# Altium PCB RGB_Plugin_Board.PcbDoc (part 3 of 3)
Units mil, origin at the board's own origin, x right, y up, seen from the top; angles counter-clockwise.
Board outline 2420 x 984.41 mil, 2 copper layers (TOP, BOTTOM), stack 81.54 mil thick; 20 components, 19 nets, 2525 pads, 9 vias.
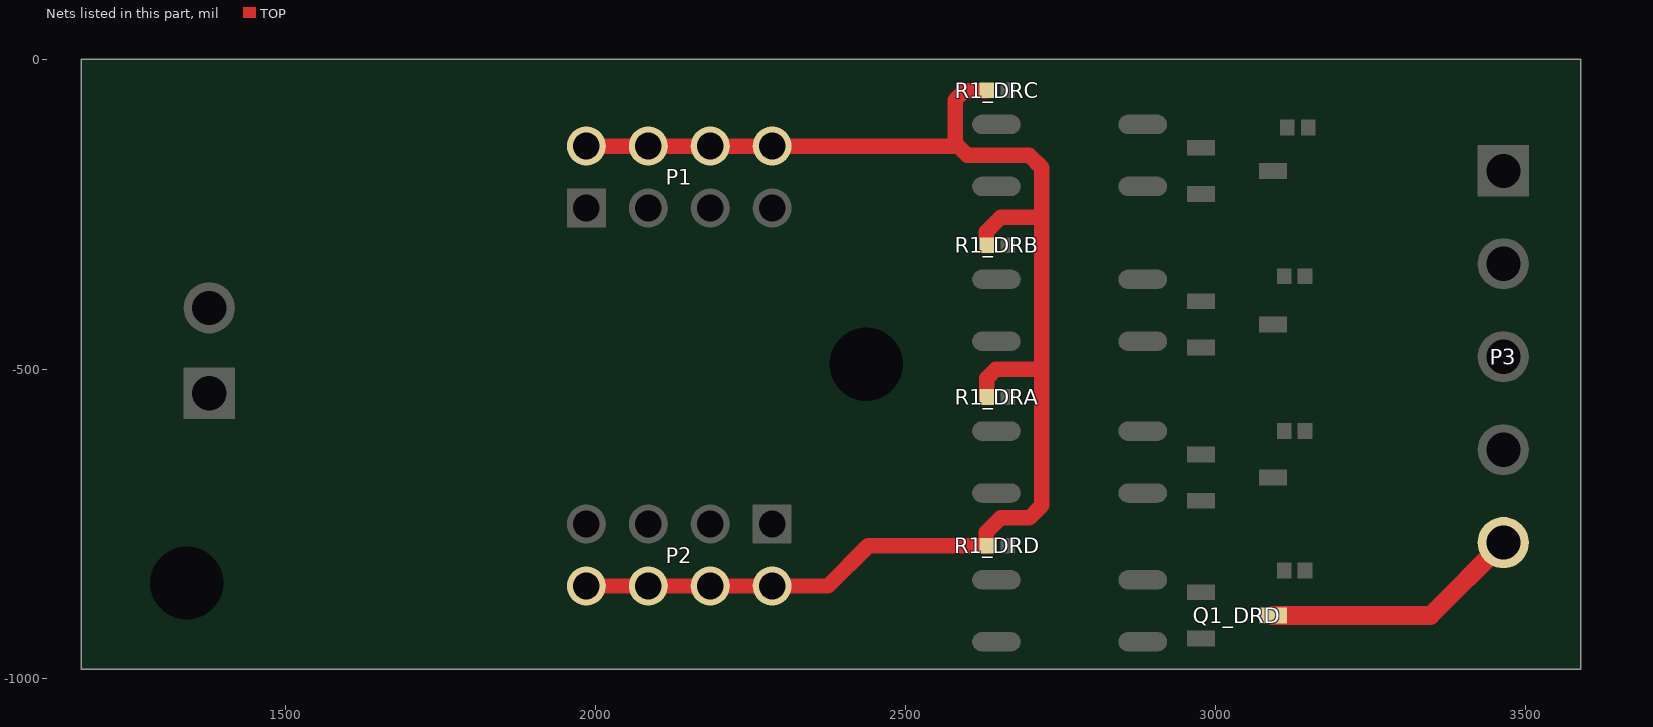
[diagram p3: the nets of this part, all layers, seen from the top]

## Via types
v1: diameter 23.62, hole 11.81, TOP to BOTTOM, 9 vias

## Nets (pads, with @x,y where several pads share a name; then routed paths per layer and width w, separated by ;. In a path a pad name is that pad's centre, name@x,y a point inside that pad or via, vN(x,y) a via of type N, cw(c..) or ccw(c..) an arc to the next point about the centre after c; other vN are vias at no path point) (continued)
RELAY_VCC: P1.2 P1.4 P1.6 P1.8 P2.2 P2.4 P2.6 P2.8 R1_DRA.1 R1_DRB.1 R1_DRC.1 R1_DRD.1 | length 2460.3
  TOP w25: P2.8@1985,-850 P2.6@2085,-850 P2.4@2185,-850 P2.2@2285,-850 2375,-850 2440,-785 R1_DRD.1@2630.69,-785 ; P1.2@1985,-140 P1.4@2085,-140 P1.6@2185,-140 P1.8@2285,-140 2585,-140 2600,-155 2700,-155 2720,-175 2720,-255 ; 2575,-140 2580.3,-134.7 2580.3,-65.64 2594.94,-50.99 R1_DRC.1@2630.69,-50.99 ; 2630.69,-284.31 2630.69,-277.88 2653.57,-255 2720,-255 ; R1_DRD.1@2631.54,-785 R1_DRD.1@2630.69,-785 ; R1_DRA.1@2631.54,-545 2631.54,-514.64 2646.18,-500 2720,-500 ; R1_DRD.1@2630.69,-785 2630.69,-762.88 2653.57,-740 2700,-740 2720,-720 2720,-500 ; 2720,-500 2720,-255
WHITE: P3.5 Q1_DRD.3 | length 420.6
  TOP w30: Q1_DRD.3@3093.07,-897.6 3347.4,-897.6 P3.5@3465,-780

## Polygon pours and split planes (outlines as drawn)
GND on BOTTOM "GND_L02_P001" (solid, pour order 1): 0,-984.41 0,0 4724.41,0 4724.41,-984.41
GND on TOP "GND_L01_P006" (solid, pour order 6): 0,-984.41 0,0 4724.41,0 4724.41,-984.41

## Silkscreen, mask and mechanical layers (free items; w line width, h text height)
Top Overlay:
  drawing of 1270 lines, arcs and shapes, not listed
  text "Expatria" at 1284.04,-130.57 h60
  text "12V" at 3225,-195 h35
  text "Technologies" at 1410,-225 h40
  text "GND" at 1285,-295 h35
  text "RED" at 3215,-350 h35
  text "AUX3" at 1970,-375 h35 r270
  text "AUX2" at 2056.67,-375 h35 r270
  text "AUX1" at 2143.33,-375 h35 r270
  text "AUX0" at 2230,-375 h35 r270
  text "GRN" at 3220,-500 h35
  text "BLU" at 3210,-670 h35
  text "LED V+" at 1260,-705 h35
  text "WHT" at 3215,-820 h35
Bottom Overlay:
  drawing of 679 lines, arcs and shapes, not listed
  text "REV '.VarRevNo'" at 1370,-60 h60
  text "Licensed under CERN-OHL-P v2" at 1895,-699.47 h50
Bottom Solder:
  region: 2691.23,-936.9 2690.03,-960.51 2694.87,-960.51 2693.66,-937.34 cw(c2696.36,-937.35) 2695.89,-934.69 cw(c2696.12,-940.72) 2696.64,-934.71 2719.7,-938.76 2716.59,-930.17 cw(c2719.78,-929.29) 2716.48,-929.56 cw(c2718.23,-929.56) 2717.13,-928.21 2742.39,-907.75 2736.7,-905.09 cw(c2737.45,-903.51) 2735.7,-903.51 cw(c2737.45,-903.51) 2735.79,-902.97 2740.78,-887.61 2726.23,-890.7 cw(c2726.02,-888.7) 2724.27,-889.68 2721.45,-883.05 2710.09,-895.24 cw(c2708.82,-894.04) 2708.82,-895.78 cw(c2708.87,-893.98) 2707.09,-894.25 cw(c2720.71,-894.43) 2707.11,-893.71 2712.59,-865.46 2703.81,-870.53 cw(c2702.92,-869.03) 2702.93,-870.77 cw(c2702.93,-869.03) 2701.36,-869.81 2692.45,-852.3 2683.54,-869.81 cw(c2681.98,-869.03) 2681.98,-870.77 cw(c2681.98,-869.03) 2681.09,-870.53 2672.31,-865.46 2677.79,-893.71 cw(c2675.81,-893.84) 2676.29,-895.77 cw(c2676.17,-893.78) 2674.81,-895.24 2663.45,-883.05 2660.63,-889.68 cw(c2659.03,-888.99) 2659.03,-890.73 2644.12,-887.61 2649.11,-902.97 cw(c2647.46,-903.51) 2649.2,-903.51 cw(c2647.46,-903.51) 2648.2,-905.09 2642.51,-907.75 2667.78,-928.21 cw(c2666.68,-929.56) 2668.42,-929.56 cw(c2666.68,-929.56) 2668.31,-930.17 2665.2,-938.76 2688.26,-934.7 cw(c2689.2,-945.72) 2688.82,-934.67 cw(c2688.69,-937.22)
  text "Designed in Canada" at 3551.97,-950.34 h100
Mechanical 3:
  the board outline again, w10
Mechanical 6:
  the board outline again, w10
Mechanical 9:
  region: 7245.42,-7032.32
  region: 7245.42,-7032.32
  region: 7245.42,-7032.32
  region: 7245.42,-7032.32
  region: 7245.42,-7032.32
  region: 7245.42,-7032.32
  region: 7245.42,-7032.32
  region: 7245.42,-7032.32
  region: 7245.42,-7032.32
  region: 7245.42,-7032.32
  region: 7245.42,-7032.32
  region: 7245.42,-7032.32
  region: 7245.42,-7032.32
  region: 7245.42,-7032.32
  region: 7245.42,-7032.32
  region: 7245.42,-7032.32
  region: 7245.42,-7032.32
  region: 7245.42,-7032.32
  region: 7245.42,-7032.32
  region: 7245.42,-7032.32
  lines w6: -2751.86,-4979.27 -2551.86,-4979.27 ; -2751.86,520.73 -2551.86,520.73 ; -2737.1,-998.96 -2537.1,-998.96 ; 83.14,-7729.27 83.14,-7529.27 ; 83.14,3070.73 83.14,3270.73 ; 2913.14,-7729.27 2913.14,-7529.27 ; 2913.14,3070.73 2913.14,3270.73 ; 3248.14,-7529.27 3248.14,-6329.27 9566.57,-6329.27 ; 5748.14,-7729.27 5748.14,-7529.27 ; 5748.14,3070.73 5748.14,3270.73 ; 7248.14,-7529.27 7248.14,-6329.27 ; 7648.14,-7529.27 9048.14,-7529.27 ; 8578.14,-7729.27 8578.14,-7529.27 ; 8578.14,3070.73 8578.14,3270.73 ; 9548.14,-7229.27 14048.14,-7229.27 ; 9548.14,-6929.27 14048.14,-6929.27 ; 9548.14,-6629.27 11048.14,-6629.27 ; 9548.14,-6344.2 9548.14,-7529.27 14048.14,-7529.27 ; 9548.14,-6329.27 11048.14,-6329.27 ; 11048.14,-7529.27 11048.14,-6929.27 11048.14,-6329.27 ; 11413.14,-7729.27 11413.14,-7529.27 ; 11413.14,3070.73 11413.14,3270.73 ; 13148.14,-7529.27 13148.14,-6929.27 ; 14048.14,-4979.27 14248.14,-4979.27 ; 14048.14,-2242.27 14248.14,-2242.27 ; 14048.14,520.73 14248.14,520.73 ; 11048.14,-6329.27 14048.14,-6329.27 14048.14,-7529.27 ; 14048.14,-7529.27 14048.14,3070.73 -2551.86,3070.73 -2551.86,-7529.27 14048.14,-7529.27 ; -2751.86,-7729.27 14248.14,-7729.27 14248.14,3270.73 -2751.86,3270.73 -2751.86,-7729.27
  text "1" at -1350.53,3135.73 h120
  text "2" at 1475.14,3135.73 h120
  text "3" at 4300.14,3135.73 h120
  text "4" at 7141.15,3135.73 h120
  text "5" at 9975.14,3135.73 h120
  text "6" at 12810.14,3135.73 h120
  text "A" at -2676.86,1892.73 h120
  text "A" at 14130.57,1834.8 h120
  text "B" at 14134.7,-869.7 h120
  text "C" at -2676.86,-3622.27 h120
  text "ENGINEER:" at 9598.14,-6429.27 h120
  text "TITLE:" at 11098.14,-6429.27 h120
  text "D" at -2676.86,-6444.27 h120
  text "D" at 14123.14,-6444.27 h120
  text "Dustin McIntire" at 9667.14,-6561.27 h120
  text "PCB DESIGNER:" at 9598.14,-6724.27 h120
  text "STV Bypass" at 11290.57,-6733.2 h200
  text "This document contains confidential information protected under Patented and" at 3386.38,-6817.77 h120
  text "Andrew Marles" at 9655.57,-6844.69 h120
  text "or Copyrighted Material as defined by US Regulations.  No disclosure," at 3386.38,-6917.77 h120
  text "reproduction, transfer of this material in part or in its entirety shall be done" at 3386.38,-7017.77 h120
  text "DATE:" at 9598.14,-7029.27 h120
  text "PART NO.:" at 11098.14,-7029.27 h120
  text "REV:" at 13198.14,-7029.27 h120
  text "without prior written  approval by Cambridge Mobile Telematics." at 3386.38,-7117.77 h120
  text "'.VarRevNo'" at 13402.14,-7147.27 h120
  text ".PRINT_DATE" at 9648.14,-7149.27 h120
  text "bluebell-mfg" at 11477.14,-7149.27 h120
  text "FILE NAME:" at 9598.14,-7329.27 h120
  text "DWG NO:" at 11098.14,-7329.27 h120
  text "SCALE:" at 13198.14,-7329.27 h120
  text ".Print_Scale" at 13289.14,-7441.27 h120
  text ".PCB_FILE_NAME_NO_PATH" at 9648.14,-7449.27 h120
  text "2" at 1475.14,-7664.27 h120
  text "3" at 4300.14,-7664.27 h120
  text "4" at 7141.15,-7664.27 h120
  text "5" at 9975.14,-7664.27 h120
  text "6" at 12810.14,-7664.27 h120
Drill Drawing:
  drawing of 166 lines, arcs and shapes, not listed
  text "NOTES: UNLESS OTHERWISE SPECIFIED, ALL DIMENSIONS ARE IN INCHES." at 8916.57,1655.8 h100
  text "1. MATERIAL: EPOXY GLASS FR-4 UL94V-0 HIGHEST IN STOCK AVAILABLE Tg." at 8916.57,1405.8 h100
  text "FABRICATE PCB IN ACCORDANCE WITH IPC-6012, CLASS2; PER IPC-6011." at 9066.57,1305.8 h100
  text "2. HOLE LOCATION TOLERANCE +/- .003 DIAMETER OF TRUE POSITION." at 8916.57,1105.8 h100
  text "ARTWORK REGISTRATION FRONT TO BACK +/- .003" at 9066.57,1005.8 h100
  text "3. ALL PLATED THROUGH HOLES TO HAVE A MINIMUM PLATING OF .0007 COPPER." at 8916.57,855.8 h100
  text "ANNULAR RING TO BE .002 MIN.  VIA HOLES MAY HAVE A .001 ANNULAR RING." at 9066.57,755.8 h100
  text "TEARDROPS MAY BE ADDED TO AVOID DRILL BREAKOUT." at 9066.57,655.8 h100
  text "ALL VIAS FILLED AND PLATED." at 9066.57,561.32 h100
  text "4. LPI (LIQUID PHOTO IMAGABLE) SOLDERMASK PER IPC-SM-840, TYPE B, CLASS H" at 8925.16,394.15 h100
  text "BOTH SIDES, COLOR: TRANSPARENT GREEN WITH MAXIMUM MISREGISTRATION" at 9075.16,294.15 h100
  text "TO BE .003 OVER BARE COPPER.  ALL EXPOSED COPPER AREAS, BOTH SIDES" at 9075.16,194.15 h100
  text "TO BE PLATED 2-6 MICROINCHES ELECTROLESS GOLD OVER 120 MICROINCHES" at 9075.16,94.15 h100
  text "ELECTROLESS NICKEL.  MANUFACTURER MAY MODIFY SOLDERMASK TO REMOVE" at 9075.16,-5.85 h100
  text "ANY SLIVERS THAT ARE .004 OR LESS BETWEEN FINE PITCHED LANDS." at 9075.16,-105.85 h100
  text "5. SILKSCREEN BOTH SIDES USING WHITE EPOXY INK.  MANUFACTURER MUST MODIFY" at 8935.16,-275.85 h100
  text "SLIKSCREEN IMAGE TO REMOVE ANY WHITE EPOXY INK FROM EXPOSED METAL." at 9085.16,-375.85 h100
  text "6. IF REQUIRED, MAXIMUM RADIUS ON ALL INSIDE CORNERS TO BE .025" at 8919.71,-523.65 h100
  text "7. MANUFACTURER TO MARK BOARD WITH COPPER OR WHITE EPOXY INK, IN AN" at 8935.16,-675.85 h100
  text "OPEN AREA ON BOTTOM SIDE, DESIGNATED WITH A UL IDENTIFICATION CODE AS" at 9085.16,-775.85 h100
  text "REQUIRED BY UL796 AND UL794" at 9085.16,-875.85 h100
  text "8. MANUFACTURER TO MARK BOARD WITH COPPER OR WHITE EPOXY INK, IN AN" at 8919.71,-1023.65 h100
  text "OPEN AREA ON BOTTOM SIDE, DESIGNATED WITH A DATE CODE INDICATING" at 9085.16,-1125.85 h100
  text "YEAR AND WEEK OF FABRICATION, 4 DIGIT FORMAT" at 9069.71,-1223.65 h100
  text "9. FINISHED BOARD TO COMPLY WITH PHYSICAL AND ENVIRONMENTAL REQUIREMENTS" at 8919.71,-1373.65 h100
  text "OF IPC-A-600. BOW AND TWIST PER 10-3, CLASS 2, MULTI AND UL796" at 9069.71,-1473.65 h100
  text "10. REFERENCE ONLY: APPROXIMATE MINIMUM LINE IS .004 AND SPACE IS .004" at 8881.16,-1636.85 h100
  text "11. UNLESS OTHERWISE SPECIFIED, BOARD SHALL BE .083 NOMINAL THICKNESS" at 8881.16,-1786.85 h100
  text "Layer" at 8515.34,-2605 h60
  text "Name" at 8766.44,-2605 h60
  text "Material" at 9252.03,-2605 h60
  text "Thickness" at 9688.46,-2605 h60
  text "Constant" at 10046.84,-2605 h60
  text "Board Layer Stack" at 10378.64,-2605 h60
  text "Top Overlay" at 8766.44,-2725 h60
  text "Top Solder" at 8766.44,-2845 h60
  text "Solder Resist" at 9252.03,-2845 h60
  text "0.40mil" at 9688.46,-2845 h60
  text "3.5" at 10046.84,-2845 h60
  text "1" at 8515.34,-2965 h60
  text "TOP" at 8766.44,-2965 h60
  text "1.40mil" at 9688.46,-2965 h60
  text "Dielectric 1" at 8766.44,-3085 h60
  text "FR-4" at 9252.03,-3085 h60
  text "78.74mil" at 9688.46,-3085 h60
  text "4.2" at 10046.84,-3085 h60
  text "2" at 8515.31,-3205 h60
  text "BOTTOM" at 8766.44,-3205 h60
  text "1.40mil" at 9688.46,-3205 h60
  text "Bottom Solder" at 8766.44,-3325 h60
  text "Solder Resist" at 9252.03,-3325 h60
  text "0.40mil" at 9688.46,-3325 h60
  text "3.5" at 10046.84,-3325 h60
  text "Bottom Overlay" at 8766.44,-3445 h60
  text "Symbol" at 8132.36,-4758.78 h72
  text "Count" at 8414.4,-4758.78 h72
  text "Hole Size" at 8677.03,-4758.78 h72
  text "Plated" at 9251.14,-4758.78 h72
  text "Hole Type" at 9498.81,-4758.78 h72
  text "Drill Layer Pair" at 9859.25,-4758.78 h72
  text "Via/Pad" at 10352.3,-4758.78 h72
  text "Pad Shape" at 10647.63,-4758.78 h72
  text "Template" at 11033.44,-4758.78 h72
  text "Description" at 11385.36,-4758.78 h72
  text "Hole Tolerance (+)" at 11772.85,-4758.78 h72
  text "Hole Tolerance (-)" at 12375.29,-4758.78 h72
  text "2" at 8414.4,-4883.19 h60
  text "118.11mil (3.000mm)" at 8677.03,-4883.19 h60
  text "PTH" at 9251.14,-4883.19 h60
  text "Round" at 9498.81,-4883.19 h60
  text "TOP - BOTTOM" at 9859.25,-4883.19 h60
  text "Pad" at 10352.3,-4883.19 h60
  text "Rounded" at 10647.63,-4883.19 h60
  text "c0h300" at 11033.44,-4883.19 h60
  text "7" at 8414.4,-5007.59 h60
  text "55.12mil (1.400mm)" at 8677.03,-5007.59 h60
  text "PTH" at 9251.14,-5007.59 h60
  text "Round" at 9498.81,-5007.59 h60
  text "TOP - BOTTOM" at 9859.25,-5007.59 h60
  text "Pad" at 10352.3,-5007.59 h60
  text "(Mixed)" at 10647.63,-5007.59 h60
  text "(Mixed)" at 11033.44,-5007.59 h60
  text "9" at 8414.4,-5132 h60
  text "11.81mil (0.300mm)" at 8677.03,-5132 h60
  text "PTH" at 9251.14,-5132 h60
  text "Round" at 9498.81,-5132 h60
  text "TOP - BOTTOM" at 9859.25,-5132 h60
  text "Via" at 10352.3,-5132 h60
  text "Rounded" at 10647.63,-5132 h60
  text "v60h30m60" at 11033.44,-5132 h60
  text "16" at 8414.4,-5256.4 h60
  text "43.31mil (1.100mm)" at 8677.03,-5256.4 h60
  text "PTH" at 9251.14,-5256.4 h60
  text "Round" at 9498.81,-5256.4 h60
  text "TOP - BOTTOM" at 9859.25,-5256.4 h60
  text "Pad" at 10352.3,-5256.4 h60
  text "(Mixed)" at 10647.63,-5256.4 h60
  text "(Mixed)" at 11033.44,-5256.4 h60
  text "34 Total" at 8414.4,-5380.81 h60

## Text inside footprints (layer, text, board x,y; h text height)
P1: Top Overlay "8" at 2334.61,-158.5 h40; Top Overlay "7" at 2334.61,-258.5 h40; Top Overlay "2" at 1911.77,-160.87 h40; Top Overlay "1" at 1923.58,-260.87 h40
P2: Top Overlay "1" at 2340,-765 h40; Top Overlay "2" at 2330,-870 h40; Top Overlay "7" at 1910,-765 h40; Top Overlay "8" at 1910,-870 h40